# Altium PCB 1069.PcbDoc (part 3 of 3)
Units mil, origin at the board's own origin, x right, y up, seen from the top; angles counter-clockwise.
Board outline 10010 x 6010 mil, 2 copper layers (Top Layer, Bottom Layer); 500 components, 334 nets, 1630 pads, 397 vias.
Unrouted connection lines stored in the file: 1187.
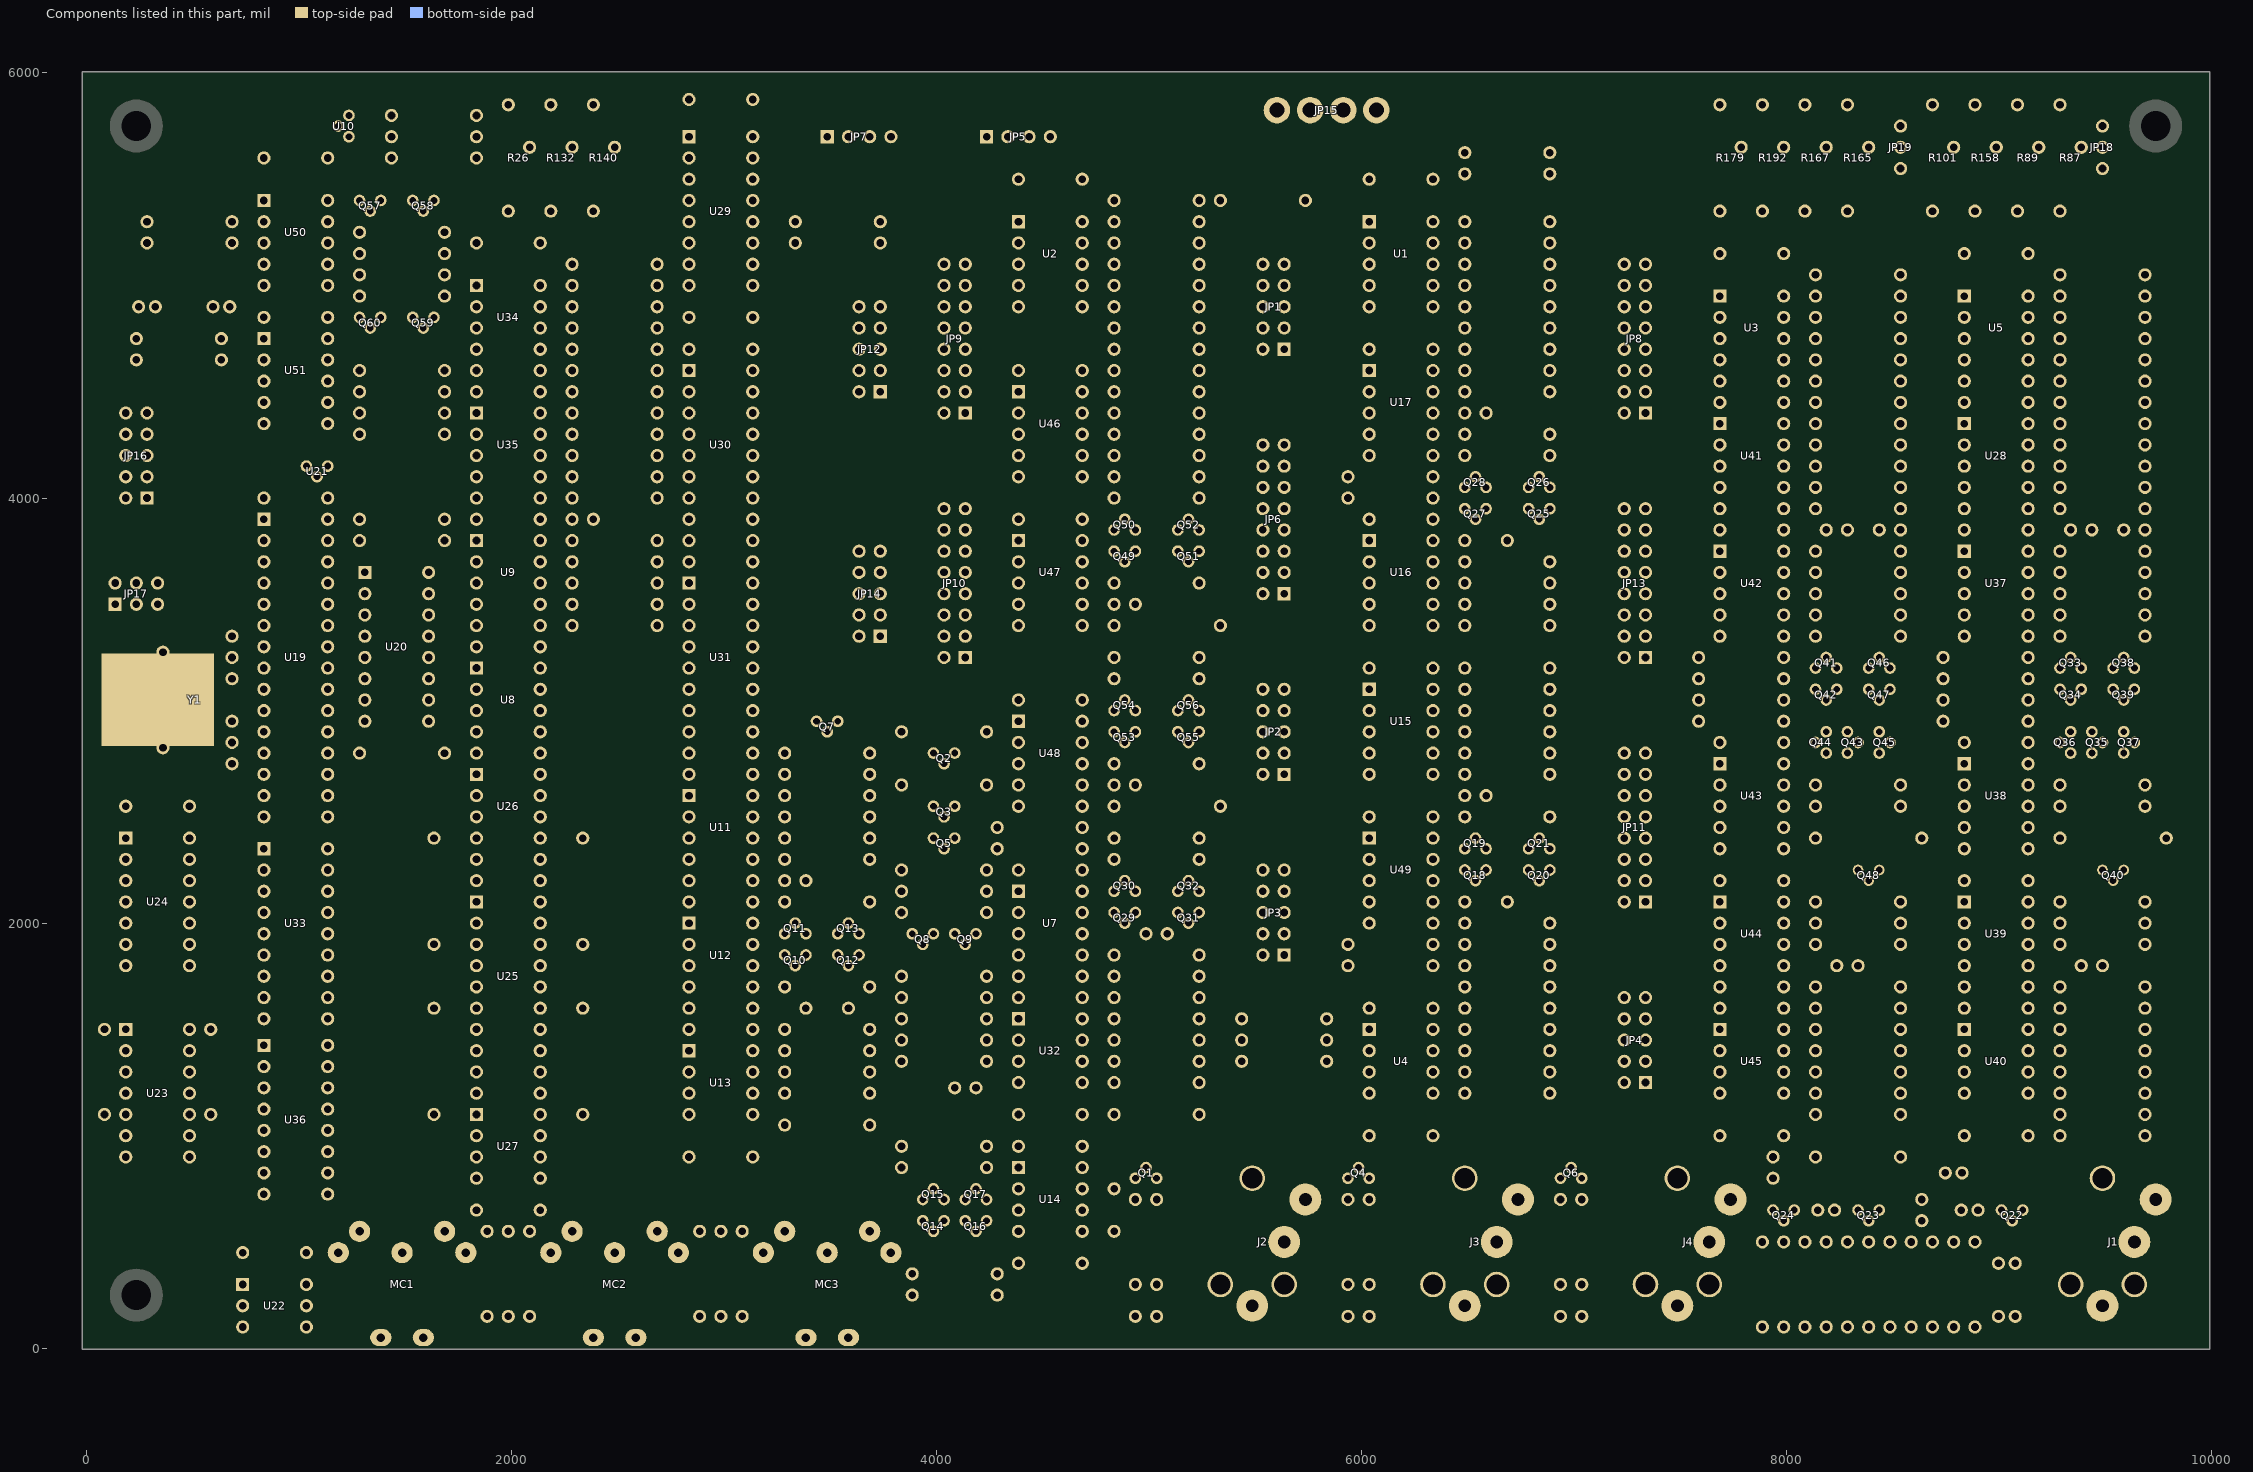
[diagram p3: the components of this part, seen from the top]

## Via types
v1: diameter 40, hole 22, Top Layer to Bottom Layer, 395 vias
v2: diameter 62, hole 36, Top Layer to Bottom Layer, 2 vias

## Nets (pads, with @x,y where several pads share a name; then routed paths per layer and width w, separated by ;. In a path a pad name is that pad's centre, name@x,y a point inside that pad or via, vN(x,y) a via of type N, cw(c..) or ccw(c..) an arc to the next point about the centre after c; other vN are vias at no path point) (continued)
copper on no net: (continued)
  Bottom Layer w12: v1(35,3750) 585,3750 635,3700 835,3700 ; v1(60,3800) 835,3800 960,3800 1010,3750 1520,3750 1570,3800 1685,3800 ; v1(60,3925) 335,3925 360,3950 960,3950 1010,3900 1135,3900 ; 135,3500 185,3550 1310,3550 ; 185,1000 485,1000 ; 185,1200 285,1200 310,1175 335,1150 635,1150 710,1075 885,1075 985,975 v1(1385,975) ; 185,1500 v1(360,1500) ; 185,2000 235,2000 310,1925 360,1925 385,1950 v1(560,1950) ; 185,2200 260,2200 310,2250 735,2250 785,2300 v1(1210,2300) ; 185,2400 v1(310,2400) ; v1(235,3350) 535,3350 585,3300 735,3300 785,3250 910,3250 1010,3350 1185,3350 1285,3250 1310,3250 ; 235,3600 285,3650 1185,3650 1235,3600 1360,3600 1385,3625 v1(1535,3625) ; 235,4650 435,4650 535,4550 835,4550 ; 245.63,4900 295.63,4850 460,4850 560,4950 760,5150 960,5150 1060,5050 1210,5050 1260,5000 1410,5000 1510,4900 1735,4900 1760,4925 1760,5025 1735,5050 1685,5050 ; 285,5300 410,5300 510,5200 685,5200 835,5200 ; v1(310,1800) 485,1800 ; 335,3500 v1(685,3500) ; v1(335,3850) 960,3850 1010,3800 1135,3800 ; v1(435,175) 635,175 660,150 885,150 935,100 1035,100 ; v1(485,350) 1085,350 1135,300 1160,275 1710,275 1785,200 2010,200 2035,175 2035,125 2060,100 2260,100 2285,125 2635,125 2660,100 3285,100 3310,125 4760,125 4910,275 4935,300 ; 485,900 560,900 685,775 1485,775 1535,825 1560,850 2360,850 2460,950 2735,950 2810,1025 2935,1025 2960,1050 v1(3035,1050) ; 485,2100 710,2100 810,2000 v1(1210,2000) ; v1(585,2700) 835,2700 ; v1(585,2775) 610,2800 835,2800 ; v1(610,400) 635,375 1110,375 1135,350 1335,350 1360,375 1410,375 1435,350 1960,350 2110,200 4735,200 4885,350 5235,350 5265,380 5755,380 5835,300 5935,300 ; v1(610,2200) v1(760,2200) ; v1(635,925) 835,925 ; v1(635,2625) 685,2625 710,2600 835,2600 ; 635,4750 735,4750 785,4800 1235,4800 1285,4750 1610,4750 1635,4775 1635,4850 2735,4850 2785,4900 3460,4900 3510,4850 4060,4850 4110,4800 4135,4800 ; 685,2850 685,2950 735,2950 785,3000 835,3000 ; 685,3150 735,3150 785,3100 835,3100 ; v1(685,3900) 835,3900 860,3900 960,3900 1010,3850 1360,3850 1385,3875 v1(1485,3875) ; 735,200 910,200 960,150 1110,150 1160,100 v1(1160,75) ; 735,300 860,300 910,250 1560,250 1660,150 1885,150 1985,150 ; v1(735,550) 885,400 1135,400 1160,375 1310,375 1335,400 1435,400 1460,375 1985,375 2135,225 3660,225 3810,375 3835,375 3885,425 4010,425 4060,375 4160,375 4235,300 4385,300 4460,225 4710,225 4860,375 5210,375 5240,405 5780,405 5835,350 6210,350 6260,400 6810,400 6910,300 6935,300 ; 835,2050 885,2100 1410,2100 1460,2150 v1(1610,2150) ; 835,2150 v1(960,2150) ; 835,2250 v1(1000,2250) ; 835,2900 960,2900 1010,2850 1160,2850 1210,2800 1285,2800 1435,2800 1585,2650 1935,2650 2035,2550 v1(2610,2550) ; 835,3400 v1(960,3400) ; 835,3500 v1(935,3500) ; 835,4650 935,4650 985,4700 1160,4700 1210,4650 2185,4650 2210,4625 2210,4575 2235,4550 2410,4550 2460,4600 2685,4600 v1(2485,4600) ; 835,5300 935,5300 985,5350 1235,5350 1285,5300 1485,5300 1585,5200 1735,5200 1785,5150 v1(2535,5150) ; v1(985,5225) 1010,5225 1035,5200 1135,5100 ; v1(985,5750) 1185,5750 1335,5750 1385,5700 1435,5700 1560,5700 1660,5600 1835,5600 ; 1135,1025 v1(1460,1025) ; 1135,1125 v1(1385,1125) ; 1135,1225 v1(1510,1225) ; 1135,1325 v1(1560,1325) ; 1135,1750 v1(1435,1750) ; 1135,1850 v1(1485,1850) ; 1135,1950 v1(1310,1950) ; 1135,2150 1285,2150 v1(1375,2240) ; 1135,2600 v1(1635,2600) ; 1135,2700 v1(1235,2700) ; 1135,2800 1160,2800 1210,2750 v1(1410,2750) ; 1135,2900 v1(1510,2900) ; 1135,3000 v1(1370,3000) ; 1135,3400 v1(1360,3400) ; 1135,3500 v1(1265,3500) ; 1135,4550 1285,4400 ; 1135,4650 1285,4500 ; 1135,5200 1285,5050 1410,5050 1510,4950 1685,4950 ; 1135,5300 1285,5150 ; 1235,5700 1310,5700 1360,5650 1510,5650 1610,5550 1910,5550 2010,5650 2085,5650 ; 1285,550 1510,550 1585,625 1735,625 1760,600 1935,600 1985,550 ; 1310,3450 1410,3450 1435,3425 1435,3200 1535,3100 1685,3100 1735,3050 1985,3050 2035,3000 2135,3000 ; 1310,3650 1485,3650 1535,3700 1710,3700 1760,3650 v1(2485,3650) ; 1335,4800 1335,4875 1360,4900 1460,4900 1510,4850 1535,4850 ; 1335,5350 1335,5425 1360,5450 1460,5450 1485,5425 1510,5400 1535,5400 ; v1(1385,325) 1935,325 2085,175 2085,150 ; v1(1385,1450) 1935,1450 1985,1400 2135,1400 ; v1(1385,2850) 1585,2850 1685,2950 1935,2950 2035,2850 2510,2850 2610,2950 v1(3285,2950) ; v1(1385,3500) 1485,3500 1535,3450 1610,3450 ; v1(1385,3925) 1460,3925 1485,3950 1910,3950 2010,4050 2160,4050 2260,3950 2535,3950 2585,3900 2835,3900 2885,3900 2935,3850 v1(2970,3850) ; 1385,4850 1435,4850 1485,4800 1585,4800 ; 1385,5400 1435,5400 1485,5350 1585,5350 ; v1(1435,3575) 1535,3575 1560,3550 1610,3550 ; v1(1460,1400) 1835,1400 ; v1(1460,2225) 1660,2225 1735,2150 2235,2150 2335,2250 3835,2250 v1(3535,2250) ; v1(1510,2050) 1935,2050 1985,2100 2135,2100 ; v1(1510,4500) 1685,4500 ; v1(1560,900) 1835,900 ; v1(1560,2100) 1835,2100 ; v1(1585,2725) 1710,2725 1735,2750 2535,2750 2635,2850 2960,2850 3010,2900 3135,2900 3235,2800 3285,2800 3485,2800 v1(3500,2815) ; v1(1610,2815) 1695,2900 1835,2900 ; 1610,3350 1585,3350 1535,3300 1535,3225 1560,3200 1685,3200 1735,3150 1985,3150 2085,3050 2210,3050 2235,3025 2235,2925 2210,2900 2135,2900 ; 1635,1600 1835,1600 ; 1635,1900 1835,1900 v1(1970,1900) ; 1635,5400 1635,5450 1685,5500 1910,5500 1935,5525 2060,5525 2235,5700 2585,5700 2635,5650 3185,5650 3210,5625 3785,5625 3810,5650 v1(4035,5650) ; 1685,550 1885,550 ; v1(1685,1500) 1835,1500 2135,1500 ; v1(1685,2000) 1835,2000 2135,2000 v1(2005,2000) ; 1835,2500 1885,2500 1910,2475 v1(1910,2380) ; 1835,2700 2035,2700 2085,2650 2935,2650 3035,2750 3860,2750 3910,2700 4435,2700 4535,2600 5285,2600 5385,2700 5435,2750 v1(5710,2750) ; 1835,3200 1885,3200 1935,3250 v1(2410,3250) ; 1835,3700 1935,3700 2085,3850 2335,3850 2385,3900 ; 1835,3800 1935,3800 2085,3950 ; 1835,4200 2010,4200 2060,4150 2185,4150 2235,4100 2285,4100 2460,4100 2560,4000 2685,4000 ; 1835,4300 1910,4300 2060,4450 2410,4450 2460,4500 2685,4500 v1(2585,4500) ; 1835,4400 1910,4400 2060,4550 2185,4550 2235,4500 2285,4500 2410,4500 2460,4550 v1(2510,4550) ; 1835,4800 1960,4800 2010,4750 2185,4750 2235,4700 2285,4700 ; 1835,4900 1910,4900 2085,5075 2210,5075 2235,5050 2310,5050 2360,5100 2685,5100 v1(2460,5100) ; 1835,5000 1910,5000 2010,5100 2285,5100 ; 1835,5800 1885,5850 1985,5850 ; v1(1910,3450) 2385,3450 2435,3400 2685,3400 ; v1(1985,1600) 2135,1600 2335,1600 ; v1(2035,3900) 2085,3950 ; 2085,550 2285,550 ; v1(2110,5775) 2435,5775 2485,5825 2635,5825 2660,5800 3235,5800 3335,5900 v1(4235,5900) ; v1(2120,5875) 2145,5900 2610,5900 2685,5825 3210,5825 3310,5925 4185,5925 4210,5950 4310,5950 4360,5900 v1(4535,5900) ; 2135,1000 v1(2535,1000) ; 2135,1900 2335,1900 ; 2135,2400 2260,2400 v1(2335,2325) ; 2135,2600 v1(2285,2600) ; 2135,3100 v1(2335,3100) ; 2135,3500 2285,3500 ; 2135,3600 2285,3600 ; 2135,3700 2160,3700 2260,3800 2285,3800 ; 2135,4100 2160,4100 2260,4000 2285,4000 ; 2135,4200 2160,4200 2260,4300 2285,4300 2435,4300 2535,4400 2685,4400 ; 2135,4300 2160,4300 2260,4400 2285,4400 2410,4400 2460,4450 v1(2535,4450) ; 2135,4700 2185,4700 2235,4650 2310,4650 2360,4700 2685,4700 ; 2135,4800 2285,4800 v1(2510,4800) ; 2135,4900 2160,4900 2260,5000 2285,5000 ; 2185,5350 2285,5450 2285,5650 ; v1(2285,3150) 3985,3150 4010,3175 4135,3175 4160,3150 4335,3150 4535,3350 6560,3350 6610,3300 6860,3300 7010,3450 7235,3450 v1(7060,3450) ; 2285,3700 2435,3700 2535,3800 2685,3800 ; v1(2335,4250) 2510,4250 2560,4300 2685,4300 ; v1(2360,4750) 2635,4750 2685,4800 ; 2385,5350 2385,5425 2460,5500 2485,5525 2485,5650 ; v1(2410,4650) 2710,4650 2760,4600 2835,4600 2935,4600 v1(3035,4725) ; v1(2435,1950) 1610,1950 ; v1(2460,4900) 2685,4900 ; v1(2485,1375) 2660,1375 2685,1350 3035,1350 3060,1325 3060,1175 3085,1150 3510,1150 3610,1250 v1(3985,1250) ; v1(2510,5000) 2685,5000 ; v1(2510,5775) 2560,5725 2610,5725 2635,5750 3160,5750 3260,5650 3735,5650 3785,5700 ; v1(2535,725) 3210,725 3260,775 3835,775 3960,900 4735,900 4785,950 5085,950 5160,1025 5535,1025 5710,850 5785,850 5885,750 6135,750 6310,925 v1(6885,925) ; v1(2585,1450) 2960,1450 3060,1550 3735,1550 3785,1500 4735,1500 4785,1550 4835,1550 ; v1(2585,3550) 2735,3550 2785,3600 2835,3600 ; v1(2585,5775) 3185,5775 3260,5700 3485,5700 ; v1(2635,1750) 1735,1750 ; v1(2660,3100) 2835,3100 3135,3100 v1(3510,3100) ; 2685,550 2885,550 ; 2685,4100 2735,4100 2785,4150 3185,4150 3235,4100 3685,4100 3735,4050 5185,4050 5235,4000 ; 2685,4200 2760,4200 2810,4250 5385,4250 5410,4225 5435,4200 5910,4200 5960,4250 v1(7110,4250) ; 2835,1400 v1(2985,1400) ; 2835,1900 2935,1900 2985,1950 3185,1950 3235,1900 3310,1900 3360,1950 3385,1950 3460,1950 3510,1900 3560,1900 3610,1950 3635,1950 ; 2835,2000 2910,2000 3035,2125 3060,2150 3210,2150 3260,2200 3285,2200 ; 2835,2400 v1(2935,2300) ; 2835,2500 2835,2600 2960,2600 3010,2650 3185,2650 3235,2700 3285,2700 ; 2835,3000 2985,3000 3035,3050 3960,3050 3985,3075 v1(4185,3075) ; 2835,4000 2985,4000 3035,4050 v1(3575,4050) ; 2835,4500 2960,4500 3010,4450 3585,4450 3635,4400 v1(3785,4400) ; 2835,5000 2985,5000 3035,4950 v1(3285,4950) ; 2835,5100 3010,5100 3060,5050 v1(3885,5050) ; 2835,5500 2935,5500 2985,5450 3185,5450 3260,5525 v1(3385,5525) ; v1(2895,1640) 2895,1715 2860,1750 1735,1750 ; v1(2935,775) 3185,775 3235,825 v1(3760,825) ; v1(2935,1700) 2985,1700 3035,1750 3160,1750 3210,1700 3285,1700 ; v1(2970,3600) 3135,3600 v1(3335,3600) ; v1(2970,3900) 3135,3900 3310,3900 3360,3850 v1(3560,3850) ; 2985,550 3035,600 3060,625 3460,625 3535,550 3685,550 ; v1(2985,1650) 3435,1650 3485,1600 3585,1600 ; v1(2985,5700) 3010,5700 3135,5700 ; v1(3000,1900) 3135,1900 ; v1(3035,1450) v1(3435,1450) ; v1(3035,2600) 3135,2500 3160,2500 3185,2525 3260,2600 3285,2600 ; v1(3060,825) 3135,825 3160,850 3585,850 3685,950 3835,950 ; 3085,550 3285,550 ; 3135,1100 3210,1100 3260,1050 3285,1050 ; 3135,1200 3160,1200 3260,1300 3285,1300 3435,1300 3535,1400 3685,1400 ; 3135,1300 3160,1300 3260,1400 3285,1400 ; 3135,1800 3185,1800 3235,1850 3285,1850 3310,1850 3360,1900 3410,1900 3460,1850 3535,1850 ; 3135,2300 3285,2300 ; 3135,2400 3160,2400 3260,2500 3285,2500 3435,2500 3535,2600 3685,2600 ; 3135,3000 3185,3000 3210,3025 v1(4035,3025) ; 3135,3500 v1(3410,3500) ; 3135,4000 v1(4210,4000) ; 3135,4500 v1(3335,4500) ; 3135,5000 v1(3535,5000) ; 3135,5100 3235,5100 3335,5200 3470,5200 3570,5300 3735,5300 ; 3135,5200 3185,5200 3235,5250 v1(3460,5250) ; 3135,5500 3185,5500 3235,5550 3335,5550 3360,5575 3410,5575 v1(3460,5525) ; 3135,5600 3185,5600 3210,5600 v1(3985,5600) ; v1(3210,1755) 3415,1755 3460,1800 3585,1800 3710,1800 3760,1750 3835,1750 ; v1(3210,2000) 3335,2000 ; v1(3360,2400) 3685,2400 ; v1(3360,2650) 3835,2650 ; v1(3385,3300) 3685,3300 3735,3350 ; v1(3410,3900) v1(3735,3900) ; v1(3435,1700) 3585,1700 3635,1650 3735,1650 3785,1700 3910,1700 v1(3935,1675) ; v1(3460,3200) v1(3735,3200) ; 3485,2900 3585,2800 3685,2800 ; 3535,1950 3535,2075 3560,2100 3685,2100 ; v1(3575,4650) 3910,4650 3960,4700 4035,4700 ; 3585,5700 3585,5775 3660,5850 4560,5850 4685,5725 5235,5725 5460,5950 5485,5950 6210,5950 6235,5925 v1(8485,5925) ; v1(3685,700) 3810,700 3935,825 4160,825 4185,800 4535,800 4585,750 4685,750 4735,750 4885,900 v1(5435,900) ; 3685,1300 3835,1450 ; 3685,2300 3735,2300 3760,2325 v1(3810,2325) ; 3685,2500 v1(3785,2500) ; v1(3685,4975) 3785,4975 3860,4900 4035,4900 ; 3735,4500 v1(3910,4500) ; 3735,4700 v1(3860,4700) ; 3735,4800 v1(3860,4800) ; v1(3785,3825) 3885,3825 3960,3750 4035,3750 ; 3835,1350 4085,1350 4135,1300 5035,1300 5085,1250 5235,1250 ; 3835,2150 3535,2150 3435,2050 3010,2050 2910,1950 1610,1950 ; 3885,350 4085,350 4185,250 4285,250 ; v1(3885,1600) 3585,1600 ; v1(3910,4575) 3985,4500 4035,4500 ; 3935,600 3985,650 4060,650 4110,600 4135,600 4160,600 4210,650 4285,650 4335,700 4510,700 4560,650 4685,650 4735,650 4835,750 ; v1(3935,2150) 4235,2150 ; v1(3935,3350) 4035,3350 ; v1(3935,3550) 4035,3550 ; 4035,700 4060,700 4110,650 4160,650 4210,700 4235,700 4260,700 4310,750 4385,750 ; v1(4035,950) 4235,950 ; 4035,2350 4135,2250 4235,2250 ; 4035,2500 4035,2625 4060,2650 4235,2650 ; 4035,2750 4210,2750 4235,2775 4235,2900 ; 4035,3950 4060,3950 4110,3900 v1(4210,3900) ; v1(4085,3125) 4360,3125 4535,3300 5510,3300 v1(5560,3250) ; 4235,850 4385,850 ; 4235,1350 4385,1350 ; 4235,1450 4385,1450 ; 4235,1550 4385,1550 ; 4285,2350 v1(4510,2350) ; 4335,5700 4385,5650 4635,5650 4685,5700 5260,5700 5485,5925 6160,5925 6185,5900 6360,5725 6960,5725 7130,5555 7505,5555 7635,5425 v1(9435,5425) ; 4385,2150 4435,2150 4485,2200 v1(4515,2200) ; 4385,2850 4535,2850 4585,2900 4735,2900 4785,2950 4860,2950 4910,3000 4935,3000 5010,3000 5060,2950 5185,2950 5235,3000 ; 4385,2950 v1(4535,2950) ; 4385,3700 v1(4520,3700) ; 4385,3800 v1(4560,3800) ; 4385,4400 v1(4535,4400) ; 4385,4500 4510,4500 4560,4550 4735,4550 4785,4500 4835,4500 ; 4385,5100 4510,5100 4560,5050 v1(5485,5050) ; 4385,5200 4485,5200 4635,5350 4710,5350 4760,5300 4835,5300 5060,5300 5160,5400 5235,5400 ; 4385,5300 4535,5300 4610,5375 4810,5375 4835,5400 ; v1(4485,4700) 4835,4700 ; v1(4500,1800) 4735,1800 4785,1750 4835,1750 ; v1(4520,3850) 4760,3850 4810,3800 4860,3800 4910,3850 4935,3850 4985,3850 5035,3800 5185,3800 5235,3850 ; v1(4535,2500) 5060,2500 5110,2550 5335,2550 5385,2550 5535,2700 ; v1(4535,3450) 5085,3450 5135,3400 5335,3400 v1(5560,3400) ; v1(4545,1900) 4735,1900 4785,1850 4835,1850 4885,1850 4935,1800 5410,1800 5485,1725 5760,1725 5935,1550 6185,1550 6285,1650 6385,1650 6410,1625 6410,1600 6435,1550 6535,1550 6635,1650 6960,1650 7010,1600 v1(7485,1600) ; v1(4550,2150) 4610,2150 4685,2075 4685,2050 ; v1(4565,2050) 4385,2050 4585,2050 4635,2000 4735,2000 4785,2050 4835,2050 4885,2100 5035,2100 5085,2050 5135,2050 ; v1(4610,500) 4785,500 4835,550 ; 4685,1250 4835,1250 ; 4685,1350 4835,1350 ; 4685,1450 4835,1450 ; 4685,1950 4735,1950 4785,1900 4885,1900 4935,1850 5235,1850 ; 4685,2350 v1(5385,2350) ; 4685,2450 v1(5485,2450) ; 4685,2750 4760,2750 4810,2700 4885,2700 4935,2650 ; 4685,2850 4735,2800 4785,2800 4835,2750 ; 4685,3700 4710,3700 4810,3600 4835,3600 4935,3500 ; 4685,4300 4835,4300 4935,4300 5035,4400 5235,4400 ; 4685,4400 4835,4400 ; 4685,5000 4735,5000 4785,4950 v1(5410,4950) ; 4685,5100 4835,5100 4985,5100 5085,5200 5235,5200 ; 4685,5200 4835,5200 ; v1(4760,2200) 4885,2200 ; v1(4760,3950) 5160,3950 5185,3925 5185,3900 ; v1(4785,1975) 4810,1975 4835,1950 4885,1950 4935,1900 5135,1900 5185,1950 5185,2000 ; 4835,1650 5010,1650 5035,1675 v1(5085,1675) ; 4835,2300 v1(5135,2300) ; 4835,2550 v1(5010,2550) ; 4835,2900 4860,2900 4910,2950 5010,2950 5060,2900 5135,2900 ; 4835,3150 v1(5135,3150) ; 4835,3400 v1(4985,3400) ; 4835,3500 4810,3500 4710,3600 4685,3600 4660,3600 4635,3625 4635,3650 4635,3725 4660,3750 4835,3750 4860,3750 4910,3800 4985,3800 5035,3750 5135,3750 ; 4835,4000 v1(5135,4000) ; 4835,4600 4960,4600 5060,4500 5235,4500 ; 4885,2000 4985,2000 v1(5010,2025) ; v1(4935,625) 5060,625 5135,700 5735,700 ; v1(4935,1025) 5060,1025 5135,1100 5235,1100 ; v1(4935,1750) 5235,1750 ; 4935,2150 5035,2150 5085,2100 5185,2100 5235,2150 ; v1(4935,2750) 5235,2750 ; v1(4935,3600) 5235,3600 ; v1(4960,4800) 5235,4800 ; v1(5010,2200) 5185,2200 v1(5360,2200) ; v1(5010,3250) 5235,3250 v1(5485,3250) ; v1(5035,2850) 5185,2850 ; v1(5085,1350) 5235,1350 5310,1350 5360,1400 5585,1400 5685,1300 5885,1300 5935,1350 6360,1350 6460,1250 6535,1250 6685,1400 6885,1400 ; v1(5085,1600) 3585,1600 ; v1(5085,4900) 5235,4900 ; 5235,1650 v1(5535,1650) ; 5235,2400 v1(5435,2400) ; 5235,3150 v1(5835,3150) ; 5235,4100 v1(5385,4100) ; 5235,4700 v1(5360,4700) ; 5235,5300 5285,5300 5335,5350 v1(5435,5350) v1(5885,5350) ; v1(5310,5250) 5460,5250 5485,5275 5935,5275 5960,5300 6035,5300 6160,5300 6210,5250 6585,5250 6635,5300 6885,5300 ; v1(5335,3200) 5535,3200 5560,3225 v1(5560,3250) ; 5435,1450 5635,1450 5735,1350 5835,1350 ; 5535,4150 5585,4100 v1(5785,4100) ; 5535,4700 5585,4650 6060,4650 6110,4700 6260,4700 6310,4650 6560,4650 6710,4800 6885,4800 ; 5535,4800 5585,4750 5685,4750 5735,4800 6385,4800 6435,4750 6560,4750 6710,4900 6885,4900 ; 5535,4900 5585,4850 6560,4850 6710,5000 6885,5000 ; 5535,5000 5585,4950 6560,4950 6710,5100 6885,5100 ; 5535,5100 5585,5050 6560,5050 6710,5200 6885,5200 ; v1(5710,3450) 6510,3450 6610,3350 v1(6760,3350) ; v1(5785,2350) 6160,2350 6210,2300 6335,2300 6485,2150 6510,2150 6560,2100 6685,2100 ; v1(5835,2850) 6060,2850 6160,2750 6360,2750 6435,2825 6460,2850 6585,2850 6685,2950 7585,2950 7685,2950 7860,2775 7935,2775 7960,2800 8035,2800 8110,2725 8460,2725 v1(8510,2775) ; v1(5835,5150) 5435,5150 v1(5385,5100) ; v1(5835,5700) 6285,5700 6935,5700 7110,5525 7160,5525 7175,5510 v1(7235,5510) ; v1(5860,2400) 6035,2400 ; v1(5885,4600) 6035,4600 v1(6200,4600) ; v1(5885,5650) 6335,5650 6410,5575 v1(6610,5575) ; v1(5935,600) 6110,600 6210,700 6735,700 ; v1(5935,925) 6210,925 6285,1000 v1(6935,1000) ; 5935,4000 5985,4000 6085,4100 6335,4100 6385,4100 6435,4150 6610,4150 6635,4125 v1(6635,4100) ; 6035,1300 v1(6185,1300) ; 6035,1400 6160,1400 6210,1450 6360,1450 6410,1400 6485,1400 6610,1400 6710,1500 6885,1500 ; 6035,1500 6210,1500 6260,1550 6360,1550 6410,1500 6485,1500 6610,1500 6660,1550 v1(7110,1550) ; 6035,2200 6210,2200 6235,2175 6235,1950 6285,1900 6335,1900 6485,1900 ; 6035,2300 6010,2300 5985,2275 5985,2175 6010,2150 6160,2150 6185,2125 6185,1900 6235,1850 6310,1850 6335,1850 6410,1850 6460,1800 6485,1800 ; 6035,3000 6135,3000 6160,3025 6185,3050 6360,3050 6410,3000 6485,3000 6635,3000 6735,3100 6885,3100 ; 6035,3100 6160,3100 6210,3150 6385,3150 6435,3100 6485,3100 ; 6035,3700 v1(6200,3700) ; 6035,3800 6185,3800 6235,3850 6360,3850 6410,3800 6485,3800 6535,3800 6560,3775 v1(6610,3775) ; 6035,4500 6110,4500 6160,4450 6210,4450 6385,4450 6435,4500 6485,4500 ; 6035,5200 6110,5200 6160,5150 6410,5150 6460,5200 6485,5200 ; v1(6135,5000) 6335,5000 ; v1(6160,3550) 6535,3550 6585,3500 6785,3500 6835,3550 7235,3550 ; v1(6185,2550) 6210,2550 6235,2525 6260,2525 6285,2550 6710,2550 6760,2600 7235,2600 ; v1(6185,2900) 6335,2900 ; v1(6195,1800) 6335,1800 6385,1800 6435,1750 6510,1750 6535,1725 6535,1650 6485,1600 ; v1(6200,3940) 6235,3940 6245,3950 6485,3950 6535,4000 6660,4000 6710,3950 6785,3950 ; v1(6200,4350) 6510,4350 6560,4400 6585,4400 6685,4400 6785,4300 6885,4300 ; v1(6200,4500) 6335,4500 ; v1(6200,4750) 6360,4750 6410,4700 6485,4700 ; v1(6205,2450) 6385,2450 6435,2500 6485,2500 ; v1(6245,2390) 6285,2350 6360,2350 6460,2250 6485,2250 6535,2300 6685,2300 6735,2250 6785,2250 6810,2250 6860,2300 6910,2300 6935,2325 6935,2375 6885,2425 6885,2500 ; v1(6260,4625) 6260,4575 6285,4550 6685,4550 6735,4600 6885,4600 ; 6335,1200 6385,1150 6935,1150 6960,1175 v1(7060,1175) ; 6335,1300 6360,1300 6485,1175 6460,1200 6485,1200 6560,1200 6660,1300 6885,1300 ; 6335,1400 6360,1400 6460,1300 6485,1300 ; 6335,2200 6385,2200 6485,2100 6535,2050 v1(6635,2050) ; 6335,3000 6360,3000 6410,2950 v1(6585,2950) ; 6335,3500 6485,3500 6535,3500 6635,3400 6885,3400 ; 6335,3600 6485,3600 6660,3600 6760,3700 6885,3700 ; 6335,3700 6485,3700 ; 6335,4400 6485,4400 ; 6485,4200 v1(6685,4200) ; 6485,4600 6635,4600 6660,4625 6735,4700 6885,4700 ; 6485,5525 6660,5525 6760,5625 6885,5625 ; 6535,2200 6660,2200 v1(6685,2175) ; 6585,2250 6670,2250 6770,2150 6860,2150 6885,2175 6885,2250 ; 6585,2350 6685,2350 6735,2300 6810,2300 6860,2350 6885,2350 ; 6585,2600 6685,2600 6785,2700 6885,2700 ; 6585,3950 6660,3950 6760,3850 6885,3850 6910,3875 6910,3925 6885,3950 ; 6585,4050 6685,4050 6735,4000 6835,4000 6885,4050 ; v1(6610,3550) 6685,3550 6735,3600 6885,3600 7485,3600 7585,3500 v1(8485,3500) ; v1(6760,4950) 7085,4950 7135,5000 7235,5000 ; 6885,2800 7035,2800 7110,2875 v1(7210,2875) ; 6885,2900 v1(7010,2900) ; 6885,3000 v1(7035,3000) ; v1(6935,600) 7135,600 7235,700 7735,700 ; v1(6960,4400) 7235,4400 ; v1(7010,3350) 7235,3350 ; v1(7060,2300) 7235,2300 ; v1(7060,2400) 7235,2400 ; v1(7110,3850) 7235,3850 7285,3800 7810,3800 7910,3900 8310,3900 8360,3950 8535,3950 ; v1(7135,1150) 7160,1150 7185,1125 8110,1125 8135,1100 v1(8460,1100) ; v1(7160,4000) 8585,4000 8685,4100 v1(9535,4100) ; 7235,1250 7285,1200 7510,1200 7560,1250 8585,1250 8810,1500 8835,1500 8985,1500 9035,1550 9435,1550 9485,1500 9685,1500 ; 7235,1350 7185,1300 7185,1175 7210,1150 9010,1150 9060,1100 9285,1100 v1(9510,1100) ; 7235,1450 7285,1500 7685,1500 7860,1500 7910,1550 8235,1550 8285,1500 8535,1500 ; 7235,1650 7285,1700 7535,1700 7585,1750 v1(8935,1750) ; 7235,3250 v1(5560,3250) ; v1(7235,4100) v1(8335,4100) ; 7235,4500 7285,4550 7585,4550 7635,4500 7735,4500 7835,4600 8635,4600 8660,4600 8760,4500 8910,4500 v1(8960,4550) ; 7235,4700 7285,4750 7425,4750 7475,4800 8410,4800 8510,4900 8610,4900 8760,4750 8835,4750 ; 7235,4800 7185,4750 7185,4675 7210,4650 7435,4650 7485,4700 8435,4700 8485,4750 8535,4750 8710,4750 8760,4700 9360,4700 9410,4750 9685,4750 ; 7235,4900 7285,4950 v1(7535,4950) ; 7235,5100 7285,5150 7385,5150 7410,5125 v1(7485,5125) ; 7335,3650 v1(7510,3650) ; v1(7385,625) 7385,475 7460,400 8810,400 8860,350 9210,350 9560,700 9735,700 ; v1(7485,4750) 7685,4750 ; v1(7535,4600) 7785,4600 7835,4650 7985,4650 ; 7585,3250 v1(7810,3250) ; v1(7610,5325) 7635,5300 v1(8460,5300) ; 7685,1400 7860,1400 7910,1450 8035,1450 8085,1500 8135,1500 ; 7685,1900 7810,1900 7860,1950 8010,1950 8060,1900 8135,1900 ; 7685,2000 7810,2000 7860,2050 8010,2050 8060,2000 8135,2000 ; 7685,3650 7835,3650 7885,3700 v1(8285,3700) ; 7685,3750 7810,3750 7860,3800 8035,3800 8085,3850 8185,3850 8235,3800 8310,3800 8385,3875 v1(8385,3900) ; 7685,4250 v1(7850,4250) ; 7685,4350 7810,4350 7860,4400 8035,4400 8085,4350 8135,4350 8310,4350 8360,4300 v1(8660,4300) ; 7685,4850 7785,4850 7835,4900 8010,4900 8060,4950 8135,4950 8235,4950 8335,5050 8535,5050 ; 7685,4950 7810,4950 7885,5025 8110,5025 8135,5050 8235,5050 8285,5100 8560,5100 8585,5075 v1(8660,5075) ; 7685,5850 7735,5900 8410,5900 8460,5850 8685,5850 ; v1(7760,3400) 8010,3400 8060,3350 8135,3350 ; v1(7835,3600) 7885,3650 7985,3650 8060,3650 8110,3600 v1(8435,3600) ; v1(7850,4150) 7985,4150 8035,4150 8085,4200 8260,4200 8310,4250 8535,4250 ; v1(7860,2875) 7860,2900 7960,2900 8185,2900 ; 7885,100 7935,50 8035,50 8085,100 8135,150 8235,150 8285,100 ; 7885,500 7885,750 7935,800 ; v1(7885,4450) 7935,4500 8010,4500 8060,4450 8135,4450 8260,4450 8360,4350 8535,4350 ; 7985,1200 8135,1200 ; 7985,1300 8135,1300 ; 7985,1400 8135,1400 ; 7985,2000 8010,2000 8060,1950 v1(8335,1950) ; 7985,2550 8135,2550 v1(8235,2450) ; 7985,2950 8035,2950 8410,2950 8485,3025 8485,3100 ; 7985,3050 8160,3050 8185,3050 ; 7985,3150 8010,3150 8060,3100 8135,3100 8185,3150 8260,3150 8310,3100 8385,3100 ; 7985,3250 8010,3250 8035,3250 8085,3200 8135,3200 ; 7985,3350 8010,3350 8110,3250 8185,3250 ; 7985,3550 8135,3550 ; 7985,4250 8135,4250 ; 7985,4750 8135,4750 8435,4750 8535,4850 ; 7985,4850 8135,4850 8340,4850 8350,4860 v1(8410,4860) ; 7985,5650 8060,5650 8110,5600 v1(8635,5600) ; 8035,650 8135,650 8145.63,650 ; 8085,500 8185,500 ; 8135,2850 8335,2850 ; 8135,3750 8335,3750 8435,3850 ; 8135,3950 v1(8285,3950) ; v1(8160,5750) 8035,5750 ; 8224.37,650 8235,650 8285,600 8385,600 ; v1(8235,2000) 8535,2000 ; 8235,3200 8285,3200 8335,3150 8435,3150 8485,3200 ; 8285,2900 8435,2900 ; v1(8285,3250) 8435,3250 8535,3350 ; v1(8310,300) 8945.63,300 8995.63,250 8995.63,150 ; 8335,650 8385,700 8510,700 8560,650 8820.63,650 ; 8335,2250 8335,2125 8360,2100 8535,2100 ; v1(8335,4450) 8535,4450 ; v1(8385,2600) v1(8285,2600) ; 8385,5650 8535,5650 ; v1(8410,4550) 8535,4550 8560,4550 8610,4550 8760,4400 8885,4400 8985,4500 9460,4500 9510,4450 9685,4450 ; 8435,2250 8485,2250 8635,2400 8635,2450 8535,2550 ; 8485,500 8560,575 8585,600 8635,600 ; v1(8535,2950) 8735,2950 ; 8535,3450 8685,3450 8735,3400 9410,3400 ; 8535,3550 8685,3550 8735,3500 9410,3500 ; 8535,3750 8685,3750 8735,3700 9410,3700 9460,3750 9685,3750 ; 8535,4650 8710,4650 8760,4600 9360,4600 9410,4650 9685,4650 ; 8535,4950 8735,4950 8785,4900 8935,4900 9035,5000 9410,5000 9510,5100 9710,5100 9760,5050 9760,4975 9735,4950 9685,4950 ; 8535,5550 9485,5550 ; 8585,500 8685,500 8760,575 8860,575 8885,600 8910,625 8910,650 ; v1(8635,1900) 8535,1900 8710,1900 8760,1850 8910,1850 9010,1750 9235,1750 9385,1900 9685,1900 ; v1(8685,3300) 9185,3300 9235,3350 9285,3350 ; 8735,3250 v1(9000,3250) ; 8785,500 8885,400 8985,400 8995.63,400 ; 8835,1400 8985,1400 9035,1450 9185,1450 9235,1500 9285,1500 ; 8835,1900 8960,1900 9010,1850 9185,1850 9235,1900 9285,1900 ; 8835,2000 8960,2000 9010,1950 9210,1950 9260,2000 9285,2000 ; 8835,2650 9035,2650 9085,2600 9435,2600 9435,2800 9435,2500 9310,2375 9285,2400 9410,2275 9410,2250 9460,2200 9535,2200 ; 8835,3650 v1(9000,3650) ; 8835,3750 9035,3750 9085,3800 9485,3800 9535,3850 9585,3850 9610,3850 9660,3800 v1(9885,3800) ; 8835,4250 v1(8970,4250) ; 8835,4350 9035,4350 9085,4300 9185,4300 9235,4350 9285,4350 9410,4350 9460,4300 v1(9785,4300) ; 8835,4850 8935,4850 8985,4900 9185,4900 9235,4950 9285,4950 9410,4950 9510,5050 9685,5050 ; 8835,4950 8935,4950 8960,4975 9035,5050 9285,5050 ; 8885,500 9010,625 9010,650 ; 8885,5350 8985,5350 9035,5300 v1(9735,5300) ; v1(8960,4650) 9135,4650 ; v1(8970,4400) 9160,4400 9210,4450 9285,4450 9410,4450 9510,4350 9685,4350 ; v1(8985,4150) 9135,4150 9185,4150 9235,4200 9435,4200 9485,4250 9685,4250 ; v1(9000,3600) 9060,3650 9135,3650 9210,3650 9260,3600 v1(9435,3600) ; v1(9010,4300) 9060,4250 9135,4250 9285,4250 ; v1(9035,2850) 9085,2900 9335,2900 ; v1(9035,3850) 9085,3900 9160,3900 9210,3950 9285,3950 9360,3950 9385,3925 9610,3925 9685,3850 9760,3850 v1(9785,3850) ; 9060,600 9060,700 9035,725 8935,725 8910,700 8910,650 ; 9135,1200 9285,1200 ; 9135,1300 9285,1300 ; 9135,1400 9285,1400 ; 9135,2000 9210,2000 9260,2050 9535,2050 ; 9135,2550 9285,2550 ; 9135,2950 9210,2950 9560,2950 9610,3000 9635,3025 9635,3100 ; 9135,3050 9335,3050 ; 9135,3150 9185,3150 9235,3100 9285,3100 9335,3150 9435,3150 9485,3100 9535,3100 ; 9135,3250 9185,3250 9235,3200 9285,3200 ; 9135,3550 9285,3550 ; 9135,4750 9285,4750 9310,4750 9410,4850 9685,4850 ; 9135,4850 9285,4850 ; 9185,5650 9260,5650 9310,5600 v1(9560,5600) ; 9285,2850 9485,2850 ; 9285,5850 v1(9585,5850) ; 9385,3200 9435,3200 9485,3150 9585,3150 9635,3200 ; v1(9385,3500) 9410,3500 ; 9385,5650 9485,5650 ; v1(9410,2000) 9685,2000 ; 9435,2900 9585,2900 ; v1(9435,3250) 9585,3250 ; v1(9485,2050) 9535,2050 ; 9485,5750 9060,5750 8985,5825 8960,5850 8885,5850 8785,5850 8685,5750 8535,5750 8035,5750 ; v1(9510,1400) 9685,1400 ; v1(9535,4550) 9685,4550 ; 9585,2250 9635,2250 9785,2400 ; 9585,2800 v1(9735,2800) ; 9685,2650 v1(9835,2650) ; 9685,3950 9410,3950 9360,4000 8700,4000 v1(8650,3950) ; 985,1850 835,1850 985,1850 ; 985,1850 1035,1800 ; 985,1850 1035,1800 ; 1010,1950 835,1950 1010,1950 ; 1010,1950 1060,1900 ; 1010,1950 1060,1900 ; 1035,1800 1685,1800 ; 1035,1800 1685,1800 ; 1060,1900 1560,1900 ; 1060,1900 1560,1900 ; 1560,1900 1610,1950 ; 1560,1900 1610,1950 ; 1685,1800 1735,1750 ; 1685,1800 1735,1750 ; 2085,3950 2185,3950 ; 2085,3950 2185,3950 ; 2185,3950 2235,3900 ; 2185,3950 2235,3900 ; 2235,3900 2285,3900 2235,3900 ; 2960,3400 2835,3400 2960,3400 ; 2960,3400 3010,3450 ; 2960,3400 3010,3450 ; 2960,4400 2835,4400 2960,4400 ; 2960,4400 3010,4350 ; 2960,4400 3010,4350 ; v1(3000,4100) 3135,4100 ; v1(3000,4100) 2835,4100 3135,4100 ; v1(3000,4100) 3135,4100 ; 3010,3450 v1(3460,3450) 3010,3450 ; 3010,4350 v1(3460,4350) 3010,4350 ; v1(3285,2950) 3335,3000 ; v1(3285,2950) 3335,3000 ; 3335,3000 3660,3000 ; 3335,3000 3660,3000 ; 3660,3000 3760,2900 ; 3660,3000 3760,2900 ; 3760,2900 3835,2900 3760,2900 ; v1(5385,5100) 5235,5100 v1(5385,5100) ; v1@6260,2600 v1(6245,2600) v1@6260,2600 ; v1@6260,2600 6485,2600 6435,2600 6385,2600 v1@6260,2600 ; v1(6635,4100) 6835,4100 v1(6635,4100) ; 7885,2650 7685,2650 7885,2650 ; 7885,2650 7935,2600 ; 7885,2650 7935,2600 ; 7935,2600 v1(8285,2600) ; 7935,2600 v1(8285,2600) ; 7935,5850 7885,5850 7935,5850 ; 7935,5850 8035,5750 ; 7935,5850 8035,5750 ; 8535,3950 v1(8650,3950) ; 8535,3950 v1(8650,3950) ; 8910,650 8899.37,650 8910,650 ; 9410,3400 9460,3450 ; 9410,3400 9460,3450 ; 9410,3500 9460,3550 ; 9410,3500 9460,3550 ; 9460,3450 9685,3450 9460,3450 ; 9460,3550 9685,3550 9460,3550 ; 9535,2050 9585,2100 ; 9535,2050 9585,2100 ; 9585,2100 9685,2100 9585,2100 ; v1(1560,4600) 1685,4600 v1(1560,4600) ; v1(1985,3200) 2135,3200 v1(1985,3200) ; v1(2635,2900) 2835,2900 v1(2635,2900) ; 2835,5200 v1(2985,5200) 2835,5200 ; 3135,3400 v1(3385,3400) 3135,3400 ; 3135,4400 v1(3385,4400) 3135,4400 ; 3135,4600 v1(3285,4600) 3135,4600 ; 4885,3050 v1(4985,3050) 4885,3050 ; 4885,3900 v1(5085,3900) 4885,3900 ; v1(5435,2800) 5535,2800 v1(5435,2800) ; v1(6185,5200) 6335,5200 v1(6185,5200) ; v1(6960,2500) 7235,2500 v1(6960,2500)
  Bottom Layer w25: v1(1260,2400) 1635,2400 ; 6335,4000 6385,4000 6410,4025 6410,4075 6435,4100 6535,4100 ; 7685,3850 7785,3850 7885,3950 7985,3950 ; 8185,100 8185,40 8385,40 ; 9074.37,150 9074.37,40 8785,40 ; v1(9210,3000) 9460,3000 9510,3050 9585,3050 ; 8385,40 8685,40 ; 8385,40 8385,100 8385,40 ; 8685,40 8785,40 ; 8685,40 8685,100 8685,40 ; 8785,40 8785,100 8785,40
  Bottom Layer w50: 85,1500 85,1525 135,1575 410,1575 485,1500 585,1500 ; 135,3600 60,3600 35,3575 35,3450 60,3425 710,3425 835,3300 ; 185,900 285,900 460,725 835,725 935,725 1010,650 1185,650 1210,675 1260,725 1960,725 2035,650 2135,650 2360,650 2535,825 2885,825 2960,900 3135,900 3510,900 3660,1050 3685,1050 4235,1050 4335,950 4385,950 4460,950 4610,1100 4685,1100 4760,1025 5060,1025 5135,1100 5585,1100 5760,925 6210,925 6285,1000 6335,1000 7310,1000 7360,950 7385,925 7810,925 7835,900 7935,900 8135,900 8160,900 8335,900 8410,825 8585,825 8660,900 8935,900 9035,1000 9135,1000 ; 185,2100 260,2100 360,2000 485,2000 ; 185,2300 485,2300 ; 185,2550 210,2550 285,2475 610,2475 735,2350 835,2350 985,2350 1060,2425 1235,2425 v1(1260,2400) 1635,2400 ; 185,4000 285,4000 460,4000 535,4075 935,4075 1010,4000 1135,4000 ; 185,4100 285,4100 ; 835,3200 960,3200 1060,3300 1135,3300 1160,3300 1310,3150 ; 835,4350 985,4350 1110,4225 1160,4225 1285,4100 1835,4100 ; 835,5000 960,5000 1035,4925 1160,4925 1235,4850 1285,4850 ; 835,5600 835,5775 910,5850 1235,5850 1235,5800 1435,5800 1435,5825 1560,5950 2760,5950 2835,5875 ; 1035,200 1160,200 1310,50 1385,50 1585,50 2410,50 2385,50 2585,50 3385,50 3585,50 ; 1135,5000 1185,5000 1235,4950 1285,4950 ; 1135,5400 1285,5400 ; 1135,5600 1435,5600 ; 1285,3800 1495,3800 1595,3900 1685,3900 ; v2(1685,3000) 1835,3000 ; v2(1685,3300) 1835,3300 ; 1835,800 2010,800 2085,725 2335,725 2510,900 2835,900 2910,975 3485,975 3635,1125 4260,1125 4285,1100 4385,1100 4510,1100 4585,1175 5635,1175 5810,1000 6035,1000 6185,1000 6260,1075 7335,1075 7410,1000 7685,1000 7835,1000 7910,1075 8035,1075 8135,975 8310,975 8335,1000 8585,1000 8685,1000 8835,1000 ; 1835,1200 1935,1200 2035,1300 2135,1300 ; 1835,4500 1935,4500 2035,4600 2135,4600 ; 1835,5200 1985,5200 2060,5275 2660,5275 2685,5300 2835,5300 ; 2835,1500 2935,1500 3035,1600 3135,1600 ; 2835,4700 2910,4700 3060,4850 3135,4850 ; 2885,150 2985,150 ; 3135,5400 3260,5400 3310,5450 4210,5450 4335,5575 4560,5575 4635,5500 4685,5500 4735,5500 4810,5575 6260,5575 ; 3335,5300 3410,5375 4235,5375 4360,5500 4385,5500 4535,5500 4610,5425 4760,5425 4835,5500 5860,5500 5910,5500 6010,5500 ; 3685,5700 3685,5800 4435,5800 4435,5700 ; 3985,1950 4060,2025 4135,2025 4185,1975 4185,1950 ; 5485,200 5485,50 6485,50 6485,200 6485,75 7485,75 7485,200 ; 5601,5825 5601,5575 6260,5575 ; 5635,3950 5760,3950 5810,3900 6035,3900 6060,3900 6160,4000 6335,4000 ; 5635,4700 6035,4700 ; 5757,5825 5910,5825 5913,5825 ; 6035,1600 6160,1600 6260,1700 6485,1700 ; 6035,2900 6100,2900 6200,2800 6335,2800 ; 6035,5500 6210,5500 6335,5375 7360,5375 7585,5150 7685,5150 7785,5150 7860,5075 v1(8060,5075) 8135,5150 8835,5150 ; 7335,1250 7460,1250 7510,1300 7685,1300 ; 7335,4400 7435,4400 7485,4450 7685,4450 ; 7660,4450 7785,4450 7885,4550 7985,4550 ; 7685,1600 7785,1600 7885,1700 7985,1700 ; 7685,3850 7785,3850 7885,3950 7985,3950 ; 9074.37,150 9085,125 9410,125 9485,200 ; 9135,5150 8935,5150 8860,5225 8110,5225 8035,5150 7985,5150 7910,5150 7835,5225 7610,5225 7435,5400 7385,5450 6435,5450 6385,5500 6335,5500 ; 6260,5575 6335,5500 ; 6260,5575 6335,5500
  other v1: 4760,3100

## Keep-outs
Keep-Out Layer:
  lines w10: -15,0 9985,0 9985,6000 -15,6000 -15,0

## Other copper
Top Layer:
  text "100-1069-02 REV A COMPONENT SIDE" at 11214,1603 h100 r90
Bottom Layer:
  text "100-1069-01 REV A CIRCUIT SIDE" at 11014,4578 h100 r90

## Silkscreen, mask and mechanical layers (free items; w line width, h text height)
Top Overlay:
  lines w10: 410,4145 845,4145 845,4260 410,4260 ; 620,4150 620,4260 ; 7250,5430 7250,5960 ; 7345,5430 7345,5960 ; 7435,5430 7435,5960 ; 7115,5430 7545,5430 7545,5960 7125,5960 7115,5960 7115,5430
  text "POT SCALE" at 2555,5980 h60 r270
  text "POT SCALE" at 2660,5965 h60 r270
  text "TRACKING" at 7360,5925 h60 r270
  text "DAC" at 1870,5920 h60 r270
  text "OFFSET" at 7455,5920 h60 r270
  text "SCALE" at 7170,5905 h60 r270
  text "RAMP" at 7265,5905 h60 r270
  text "O" at 675,5900 h50
  text "O" at 570,5855 h50
  text "100-1069" at 6335,5850 h50
  text "NOOTA" at 365,5830 h150
  text "(" at 705,5750 h150 r90
  text "1" at 3463,5604 h60
  text "+15" at 5480,5595 h60
  text "GND" at 5750,5595 h60
  text "1" at 4250,5590 h60
  text "-15" at 5995,5590 h60
  text "PITCH POTS" at 3588,5555 h60
  text "1" at 5793,4695 h60
  text "1" at 3870,4486 h60
  text "1" at 4281,4409 h60
  text "1" at 7496,4392 h60
  text "GND" at 505,4290 h60 r90
  text "SCL" at 440,4170 h60
  text "SDA" at 650,4170 h60
  text "VCC" at 495,3960 h60 r90
  text "1" at 526,3953 h60
  text "1" at 5804,3549 h60
  text "ISP" at 455,3480 h60
  text "1" at 3874,3340 h60
  text "1" at 85,3300 h85
  text "1" at 7500,3239 h60
  text "1" at 4379,3229 h60
  text "1" at 5797,2696 h60
  text "1" at 7500,2083 h60
  text "1" at 5793,1846 h60
  text "100-1069-05 REV A COMPONENT SIDE LEGEND" at 10791,1828 h100 r90
  text "1" at 7496,1236 h60
  text "START/" at 6420,1050 h60
  text "CLOCK" at 5470,1040 h60
  text "STOP" at 6415,975 h60
  text "RST" at 7285,970 h60
Top Solder:
  text "100-1069-04 REV A COMPONENT SIDE SOLDER MASK" at 11729,917 h100 r90
Bottom Solder:
  text "100-1069-03 REV A CIRCUIT SIDE SOLDER MASK" at 11471,5093 h100 r90
Mechanical 1:
  lines w10: -15,0 9985,0 9985,6000 -15,6000 -15,0
Drill Drawing:
  lines w10: -15,-400 -15,-200 ; 76.87,-330.62 -15,-300 ; 76.87,-269.38 -15,-300 ; 4674.15,-300 -15,-300 ; 5295.85,-300 9985,-300 ; 9893.13,-330.62 9985,-300 ; 9893.13,-269.38 9985,-300 ; 9985,-400 9985,-200 ; 10185,0 10385,0 ; 10185,6000 10385,6000 ; 10262.71,66.87 10285,0 ; 10262.71,5933.13 10285,6000 ; 10285,2801.61 10285,0 ; 10285,3198.39 10285,6000 ; 10307.29,66.87 10285,0 ; 10307.29,5933.13 10285,6000
  text "6000mil" at 10251.56,3188.39 h50 r270
  text ".LEGEND" at 10408,1529 h100
  text "100-1069 REV A FAB DRAWING" at 10410,675 h100
  text "10000mil" at 4684.15,-345.93 h85

## Text inside footprints (layer, text, board x,y; h text height)
C25: Top Overlay "+" at 8540,540 h85 r90
C26: Top Overlay "+" at 7895,695 h85 r90
C27: Top Overlay "+" at 8795,660 h85
C28: Top Overlay "+" at 8055,685 h85
C29: Top Overlay "+" at 8910,425 h85
C30: Top Overlay "+" at 8935,60 h85
C108: Top Overlay "+" at 110,4875 h85
C111: Top Overlay "+" at 810,4925 h85 r180
C125: Top Overlay "+" at 8625,795 h85